# Altium PCB diban_v1.0.PcbDoc
Units mil, origin at the board's own origin, x right, y up, seen from the top; angles counter-clockwise.
Board outline 2755.91 x 2755.91 mil, 2 copper layers (Top Layer, Bottom Layer), stack 21.6 mil thick; 98 components, 78 nets, 436 pads, 149 vias.
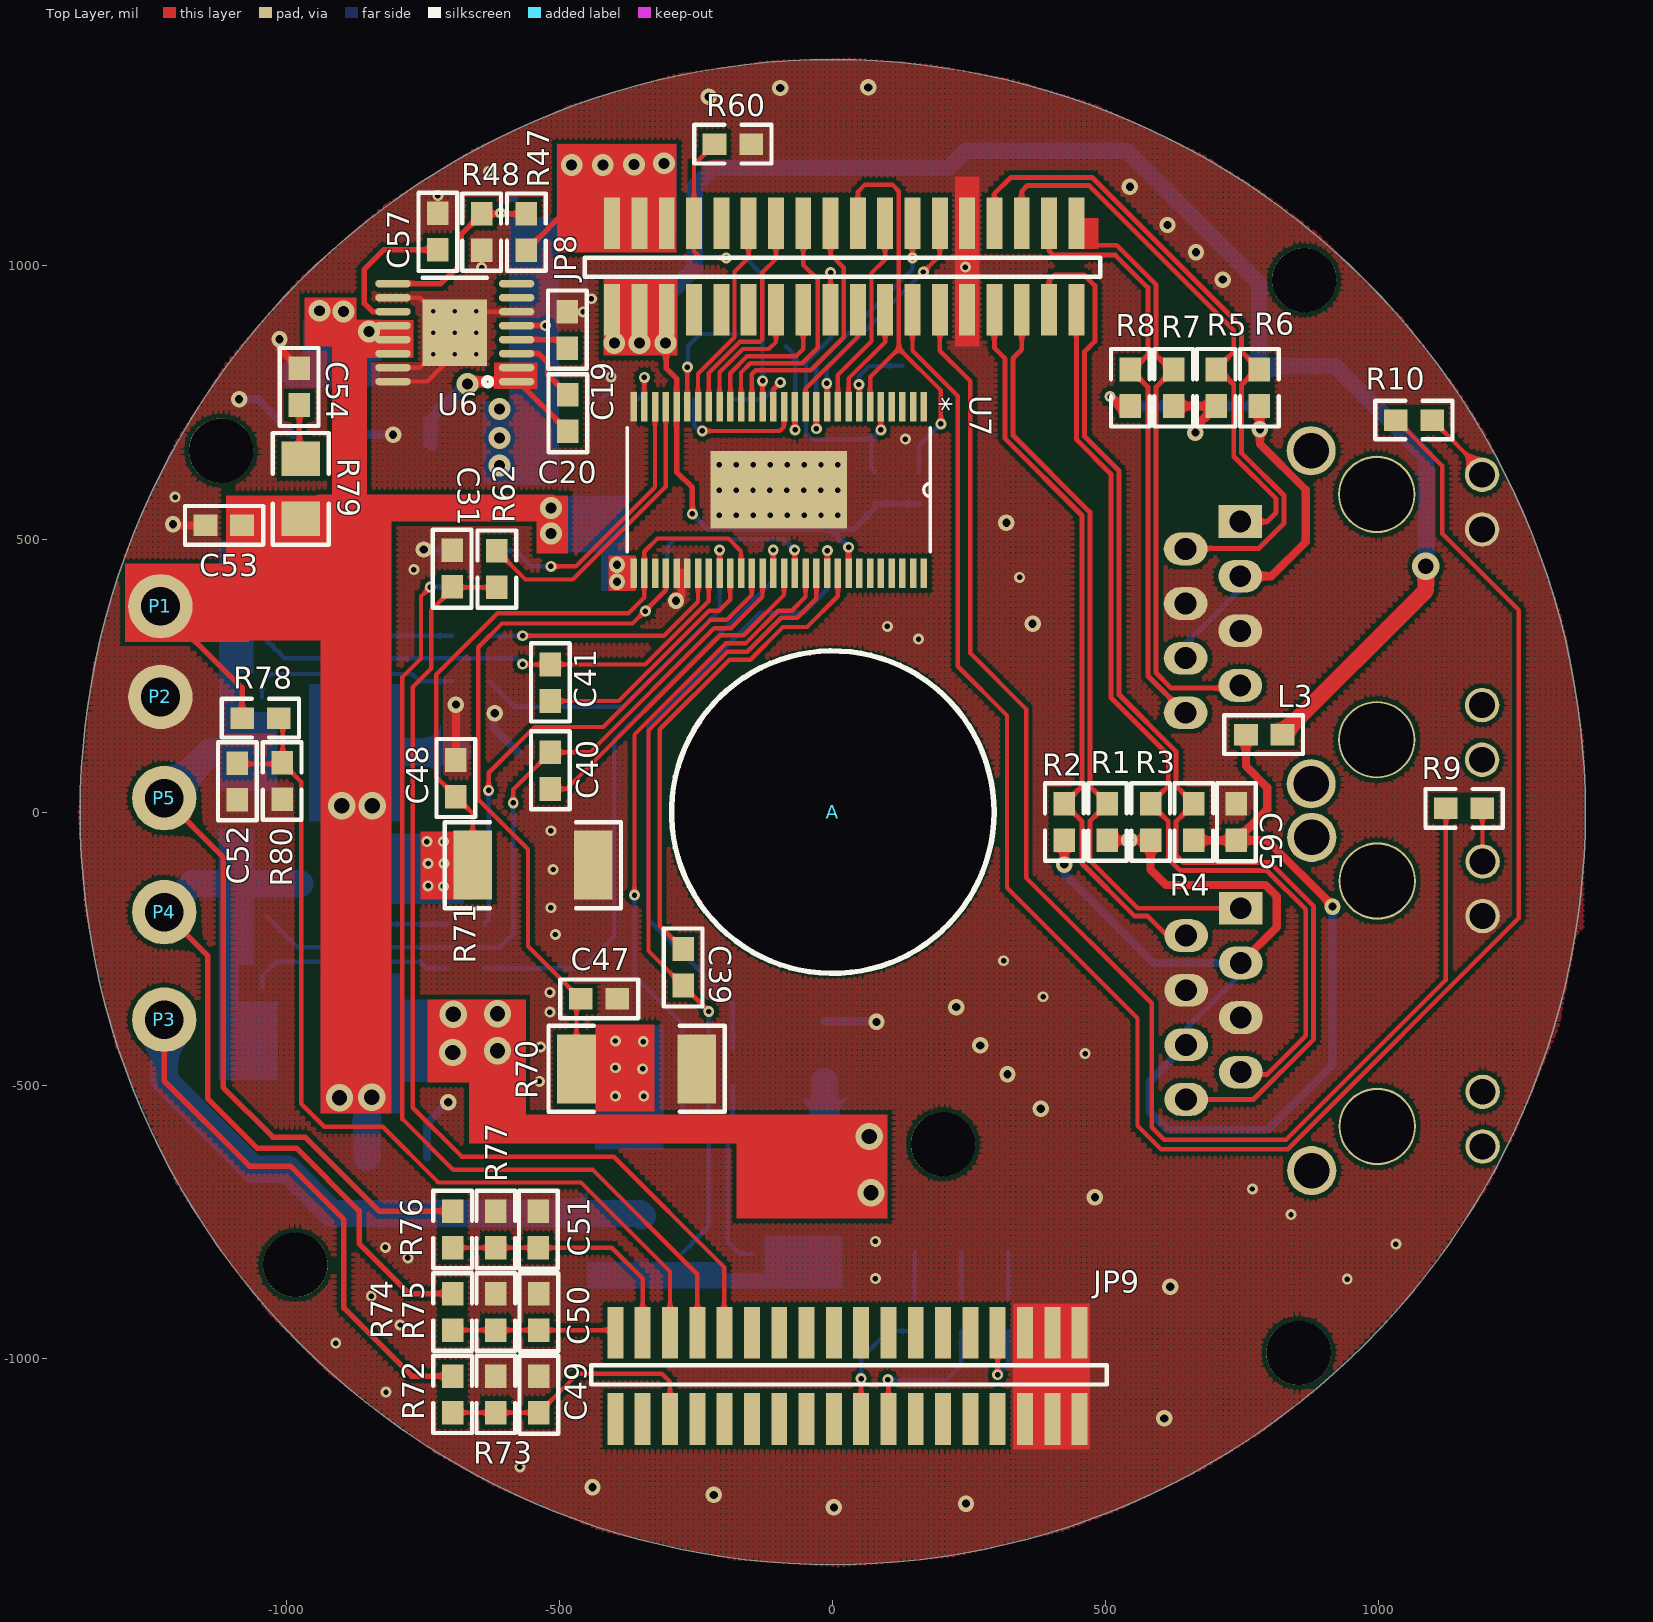
[diagram p0: Top Layer view]
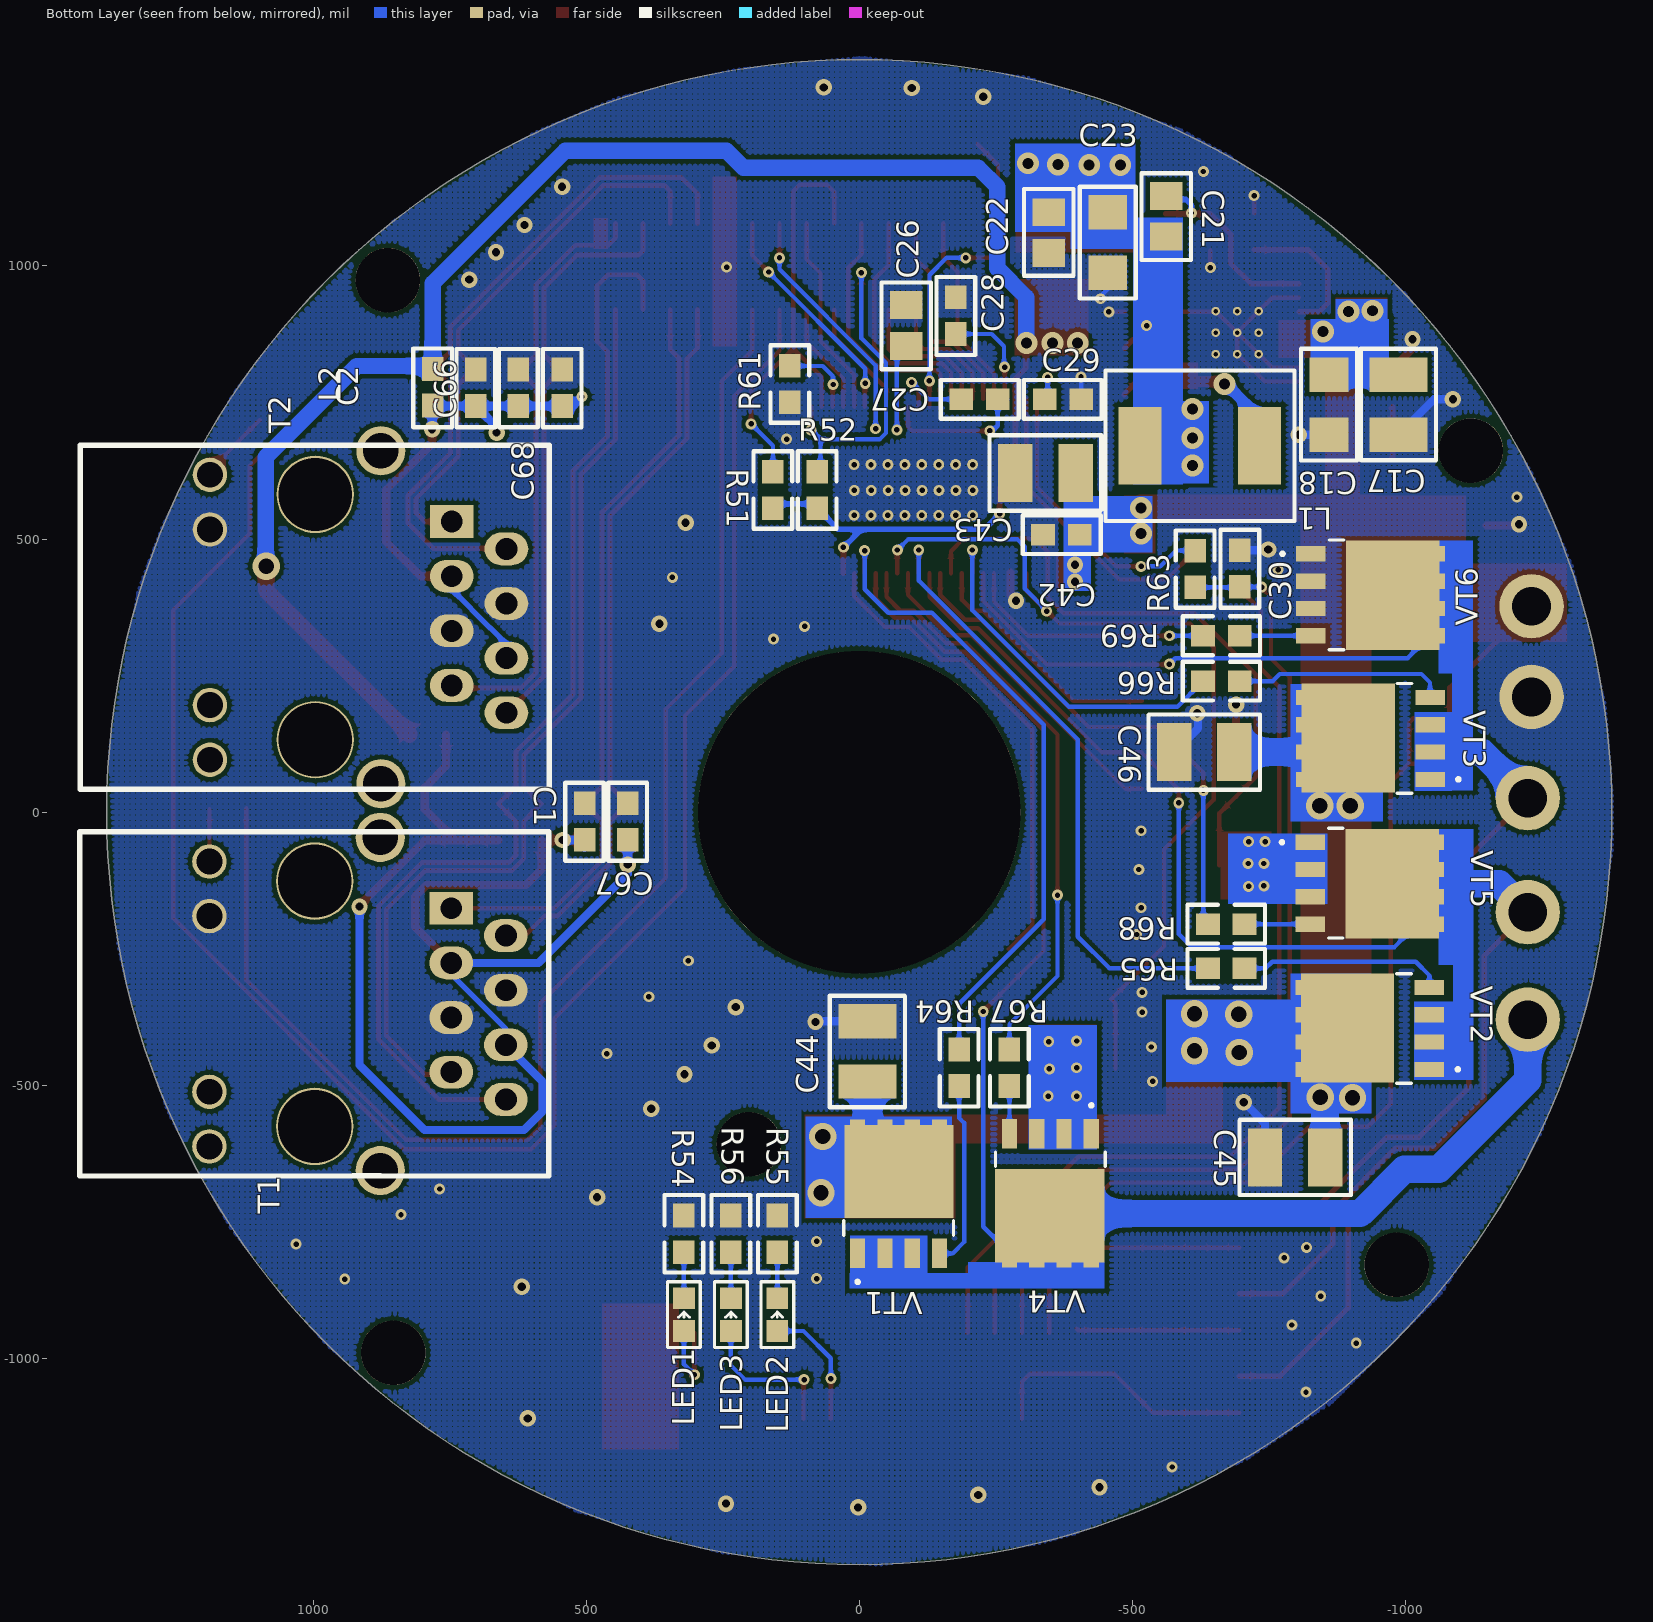
[diagram p1: Bottom Layer view, seen from below]

## Layer stack, top to bottom
Top Solder: solder mask 0.4, Solder Resist, Dk 3.5
Top Layer: signal copper 2.35
Dielectric 1: core 16.9, 3313, Dk 4.8
Bottom Layer: signal copper 2.35
Bottom Solder: solder mask 0.4, Solder Resist, Dk 3.5

## Board outline
-1377.95,0 ccw(c0,0) 0,-1377.95 ccw(c0,0) 1377.95,0 ccw(c0,0) 0,1377.95 ccw(c0,0)

## Design rules (kind name [scope] priority, off if disabled: settings)
Clearance Clearance_2 [InNet('GND')] p1: gap=8
Clearance Clearance_1 [InNet('48V') vs InNet('GND')] p2: gap=15
Clearance [All] p3: gap=5
ComponentClearance [All] p1: gap=0 collisioncheckmode=3 verticalgap=0 showdistances=FALSE
DiffPairsRouting [All] p1: maxlimit=5.5 minlimit=5.5 mostfreqgap=5.5 toplayer_minwidth=9 toplayer_maxwidth=9 toplayer_prefwidth=9 bottomlayer_minwidth=9 bottomlayer_maxwidth=9 bottomlayer_prefwidth=9 maxuncoupledlength=500
HoleSize [All] p1: absolutevalues=TRUE maxlimit=600 minlimit=1 maxpercent=80.000 minpercent=20.000
HoleToHoleClearance [All] p1: gap=5 allowstackedmicrovias=TRUE
MinimumSolderMaskSliver [All] p1: minsoldermaskwidth=0
PlaneClearance [All] p1: clearance=10
PlaneConnect [All] p1: planeconnectstyle=Relief reliefexpansion=12 reliefentries=4 reliefconductorwidth=15 reliefairgap=10
PolygonConnect [All] p1: connectstyle=Direct reliefconductorwidth=10 reliefentries=4 polygonreliefangle="90 Angle" airgapwidth=10
RoutingVias [All] p1: holewidth=10 width=20 viastyle="Through Hole" minholewidth=10 minwidth=20 maxholewidth=28 maxwidth=50
SilkToSilkClearance [All] p1: silktosilkclearance=0
SilkToSolderMaskClearance [IsPad] p1: minsilkscreentomaskgap=0 clearancetoexposedcopper=TRUE
SolderMaskExpansion [All] p1: expansion=10
UnpouredPolygon [All] p1: allowunpoured=FALSE
Width [All] p1: maxlimit=50 minlimit=5 preferedwidth=10
20 further rules are at their usual default settings.

## Classes and differential pairs
differential pair TXB: +TXB_P -TXB_N
differential pair TXA: +TXA_P -TXA_N
differential pair RXB: +RXB_P -RXB_N
differential pair RXA: +RXA_P -RXA_N

## Components (designator, comment, footprint, x,y, rotation, side; value= is the part's Value field where it differs from the comment)
A "circle" Circle 0,0 r90 top locked
C1 "0603B223J6R3NT" CC1608-0603 503,-17 r270 bottom
C2 "0603B223J6R3NT" CC1608-0603 702,777 r270 bottom
C17 "C3225X7S2A475M200AB" CC3225-1210 -987,746 r270 bottom
C18 "C3216X5R2A105K" CC3216-1206 -860,746 r270 bottom
C19 "0603B225J6R3NT" CC1608-0603 -486,883 r90 top
C20 "0603B474J6R3NT" CC1608-0603 -485,731 r270 top
C21 "CL21C360JBANNNC" CC2012-0805 -562,1091 r270 bottom
C22 "GRM21BR61E475KA12L" CC2012-0805 -347,1061 r90 bottom
C23 "GRM31CR61A476KE15L" CC3216-1206 -455,1043 r90 bottom
C26 "0603B225J6R3NT" CC2012-0805 -86,891 r270 bottom
C27 "0603B223J500NT" CC1608-0603 -220,756 r180 bottom
C28 "0603B105J250NT" CC1608-0603 -177,909 r270 bottom
C29 "0603B105J250NT" CC1608-0603 -373,756 r0 bottom
C30 "0603B222J6R3NT" CC1608-0603 -697,446 r270 bottom
C31 "0603B222J6R3NT" CC1608-0603 -697,446 r270 top
C39 "0603B104J500NT" CC1608-0603 -274,-284 r270 top
C40 "0603B104J500NT" CC1608-0603 -517,76 r90 top
C41 "0603B104J500NT" CC1608-0603 -517,237 r90 top
C42 "0603B104J101NT" CC1608-0603 -370,508 r180 bottom
C43 "GRM32ER72A225KA35L" CC3225-1210 -341,621 r180 bottom
C44 "GRM32ER72A225KA35L" CC3225-1210 -15,-438 r90 bottom
C45 "GRM32ER72A225KA35L" CC3225-1210 -798,-632 r0 bottom
C46 "GRM32ER72A225KA35L" CC3225-1210 -631.54,110 r0 bottom
C47 "0603B102J500NT" CC1608-0603 -428,-342 r0 top
C48 "0603B102J500NT" CC1608-0603 -690,62 r90 top
C49 "0603B104J160NT" CC1608-0603 -538,-1066 r270 top
C50 "0603B104J160NT" CC1608-0603 -538,-915 r270 top
C51 "0603B104J160NT" CC1608-0603 -539,-764 r270 top
C52 "0603B104J160NT" CC1608-0603 -1090,56 r90 top
C53 "0603B104J101NT" CC1608-0603 -1115,525 r0 top
C54 "0603B103J101NT" CC1608-0603 -977,779 r270 top
C57 "0603B474J6R3NT" CC1608-0603 -723,1063 r270 top
C65 "0402B104J6R3NT" CC1608-0603 739,-18 r270 top
C66 "0402B104J6R3NT" CC1608-0603 544,777 r270 bottom
C67 "0603B223J6R3NT" CC1608-0603 424,-17 r270 bottom
C68 "0603B223J6R3NT" CC1608-0603 624,777 r270 bottom
JP8 "Header 18X2" DC_1.27_36 -404,920 r180 top locked
JP9 "Header 18X2" DC_1.27_36 452,-953 r0 top locked
L1 "SPR6540-150M" SPR6540 -733,671 r0 bottom
L2 "BLM18EG221SN1D" BLM0603 781,778 r270 bottom
L3 "BLM18EG221SN1D" BLM0603 790,142 r180 top
LED1 "LED Chip" 0603D 321,-950 r90 bottom
LED2 "LED Chip" 0603D 150,-950 r90 bottom
LED3 "LED Chip" 0603D 235,-950 r90 bottom
P1 "PAD" PAD#1 -1231,377 r0 top
P2 "PAD" PAD#1 -1231,211 r0 top
P3 "PAD" PAD#1 -1224,-380 r90 top
P4 "PAD" PAD#2 -1224,-203 r90 top
P5 "PAD" PAD#3 -1224,-20 r90 top
R1 "RC03K49R9JT" CR1608-0603 503,-18 r270 top
R2 "RC03K49R9JT" CR1608-0603 424,-18 r270 top
R3 "RC03K49R9JT" CR1608-0603 582,-18 r270 top
R4 "RC03K49R9JT" CR1608-0603 661,-18 r270 top
R5 "RC03K49R9JT" CR1608-0603 702,777 r270 top
R6 "RC03K49R9JT" CR1608-0603 781,777 r270 top
R7 "RC03K49R9JT" CR1608-0603 624,777 r270 top
R8 "RC03K49R9JT" CR1608-0603 545,777 r270 top
R9 "RC03K331JT" CR1608-0603 1156,7 r0 top
R10 "RC03K331JT" CR1608-0603 1064,718 r0 top
R47 "RC03K105JT" CR1608-0603 -561,1062 r90 top
R48 "RC03K2553JT" CR1608-0603 -643,1062 r270 top
R51 "RC03K103JT" CR1608-0603 158,590 r270 bottom
R52 "RC03K103JT" CR1608-0603 77,590 r270 bottom
R54 "RC03K331JT" CR1608-0603 321,-772 r270 bottom
R55 "RC03K331JT" CR1608-0603 150,-772 r270 bottom
R56 "RC03K331JT" CR1608-0603 235,-772 r270 bottom
R60 "RC03K102JT" CR1608-0603 -183,1223 r180 top
R61 "RC03K101JT" CR1608-0603 127,784 r90 bottom
R62 "RC03K560JT" CR1608-0603 -615,445 r90 top
R63 "RC03K560JT" CR1608-0603 -615,445 r90 bottom
R64 "RC03K100JT" CR1608-0603 -183,-468 r90 bottom
R65 "RC03K100JT" CR1608-0603 -672,-286 r0 bottom
R66 "RC03K100JT" CR1608-0603 -663,240 r0 bottom
R67 "RC03K100JT" CR1608-0603 -275,-468 r90 bottom
R68 "RC03K100JT" CR1608-0603 -672,-205 r0 bottom
R69 "RC03K100JT" CR1608-0603 -663,323 r0 bottom
R70 "CRA2512-FZ-R010ELF" CR6332-2512 -359,-470 r180 top
R71 "CRA2512-FZ-R010ELF" CR6332-2512 -549,-97 r180 top
R72 "RC03K8452JT" CR1608-0603 -696,-1066 r270 top
R73 "RC03K4991JT" CR1608-0603 -617,-1066 r270 top
R74 "RC03K8452JT" CR1608-0603 -696,-915 r270 top
R75 "RC03K4991JT" CR1608-0603 -617,-915 r270 top
R76 "RC03K8452JT" CR1608-0603 -696,-764 r270 top
R77 "RC03K4991JT" CR1608-0603 -617,-764 r270 top
R78 "RC03K8452JT" CR1608-0603 -1048,172 r180 top
R79 "CRCW12063R30JNEA" CR3216-1206 -974,592 r270 top
R80 "RC03K4991JT" CR1608-0603 -1008,57 r90 top
T1 "HR911102_RJ45" RJ45 647,-326 r90 bottom
T2 "HR911102_RJ45" RJ45 646,382 r90 bottom
U6 "LM46002PWPR" IM46002 -692,878 r180 top
U7 "DRV8301" DRV8301 -99,590 r270 top
VT1 "CSD18540" "CSD18540 - duplicate" -72,-699 r90 bottom
VT2 "CSD18540" "CSD18540 - duplicate" -935,-396 r0 bottom
VT3 "CSD18540" "CSD18540 - duplicate" -936,135 r0 bottom
VT4 "CSD18540" "CSD18540 - duplicate" -350,-698 r270 bottom
VT5 "CSD18540" "CSD18540 - duplicate" -935,-130 r180 bottom
VT6 "CSD18540" "CSD18540 - duplicate" -936,398 r180 bottom

## Footprints (in the part's own frame and the unit in brackets; to place one, negate y for a bottom-side part, rotate by r counter-clockwise, add the part's x,y. Pads: shape width x height; smd on the part's side, far side on the other; paste and mask are expansions set on the pad)
0603D [mil]
  rect 40x40 smd: 1(0,0) 2(60,0)
  silkscreen extent -30,-30 90,30
BLM0603 [mm]
  rect 1.1x1 smd: 1(-0.85,0) 2(0.85,0)
  silkscreen extent -1.8,-0.9 1.86,0.9
CC1608-0603 [mm]
  rect 1.1x1 smd: 1(-0.85,0) 2(0.85,0)
  silkscreen extent -1.8,-0.9 1.83,0.9
CC2012-0805 [mm]
  rect 1.3x1.5 smd: 1(-0.95,0) 2(0.95,0)
  silkscreen extent -2,-1.15 2.03,1.15
CC3216-1206 [mm]
  rect 1.6x1.8 smd: 1(-1.4,0) 2(1.4,0)
  silkscreen extent -2.6,-1.3 2.59,1.3
CC3225-1210 [mm]
  rect 1.6x2.7 smd: 1(-1.4,0) 2(1.4,0)
  silkscreen extent -2.6,-1.75 2.59,1.75
Circle [mm]
  round 15 hole 15: 0(0,0)
  silkscreen extent -7.5,-7.5 7.5,7.5
CR1608-0603 [mm]
  rect 1.1x1 smd: 1(-0.85,0) 2(0.85,0)
  silkscreen extent -1.8,-0.9 1.8,0.9
CR3216-1206 [mm]
  rect 1.6x1.8 smd: 1(-1.4,0) 2(1.4,0)
  silkscreen extent -2.6,-1.3 2.6,1.3
CR6332-2512 [mm]
  rect 1.8x3.2 smd: 1(-2.8,0) 2(2.8,0)
  silkscreen extent -4.1,-2 4.1,2
"CSD18540 - duplicate" [mm]
  rect 1.372x0.71 smd paste-0.673: 1(-2.77,-0.635) 1(-2.77,0.635) 1(-2.77,1.905) 4(-2.77,-1.905) 5(2.77,-1.905) 5(2.77,-0.635) 5(2.77,0.635) 5(2.77,1.905)
  rect 4.343x5.08 smd: 5(1.041,-0.025)
  silkscreen extent -4.17,-2.55 -1.25,2.55
DC_1.27_36 [mm]
  rect 0.74x2.4 smd: 1(0,0) 2(0,-4.013) 3(-1.27,0) 4(-1.27,-4.013) 5(-2.54,0) 6(-2.54,-4.013) 7(-3.81,0) 8(-3.81,-4.013) 9(-5.08,0) 10(-5.08,-4.013) 11(-6.35,0) 12(-6.35,-4.013) 13(-7.62,0) 14(-7.62,-4.013) 15(-8.89,0) 16(-8.89,-4.013) 17(-10.16,0) 18(-10.16,-4.013) 19(-11.43,0) 20(-11.43,-4.013) 21(-12.7,0) 22(-12.7,-4.013) 23(-13.97,0) 24(-13.97,-4.013) 25(-15.24,0) 26(-15.24,-4.013) 27(-16.51,0) 28(-16.51,-4.013) 29(-17.78,0) 30(-17.78,-4.013) 31(-19.05,0) 32(-19.05,-4.013) 33(-20.32,0) 34(-20.32,-4.013) 35(-21.59,0) 36(-21.59,-4.013)
  silkscreen extent -22.71,-2.41 1.27,-1.52
DRV8301 [mil]
  rect 54x12 smd: 1(-152.5,265.75) 2(-152.5,246.06) 3(-152.5,226.38) 4(-152.5,206.69) 5(-152.5,187.01) 6(-152.5,167.32) 7(-152.5,147.64) 8(-152.5,127.95) 9(-152.5,108.27) 10(-152.5,88.58) 11(-152.5,68.9) 12(-152.5,49.21) 13(-152.5,29.53) 14(-152.5,9.84) 15(-152.5,-9.84) 16(-152.5,-29.53) 17(-152.5,-49.21) 18(-152.5,-68.9) 19(-152.5,-88.58) 20(-152.5,-108.27) 21(-152.5,-127.95) 22(-152.5,-147.64) 23(-152.5,-167.32) 24(-152.5,-187.01) 25(-152.5,-206.69) 26(-152.5,-226.38) 27(-152.5,-246.06) 28(-152.5,-265.75) 29(152.5,-265.75) 30(152.5,-246.06) 31(152.5,-226.38) 32(152.5,-206.69) 33(152.5,-187.01) 34(152.5,-167.32) 35(152.5,-147.64) 36(152.5,-127.95) 37(152.5,-108.27) 38(152.5,-88.58) 39(152.5,-68.9) 40(152.5,-49.21) 41(152.5,-29.53) 42(152.5,-9.84) 43(152.5,9.84) 44(152.5,29.53) 45(152.5,49.21) 46(152.5,68.9) 47(152.5,88.58) 48(152.5,108.27) 49(152.5,127.95) 50(152.5,147.64) 51(152.5,167.32) 52(152.5,187.01) 53(152.5,206.69) 54(152.5,226.38) 55(152.5,246.06) 56(152.5,265.75)
  round 20 / inner round 60 / far side round 20 hole 10: 57(-46.5,108.5) 57(-46.5,77.5) 57(-46.5,46.5) 57(-46.5,-15.5) 57(-46.5,15.5) 57(-46.5,-46.5) 57(-46.5,-77.5) 57(-46.5,-108.5) 57(1,108) 57(1,77) 57(1,46) 57(1,15) 57(1,-16) 57(1,-47) 57(1,-78) 57(1,-109) 57(46.5,108.5) 57(46.5,77.5) 57(46.5,46.5) 57(46.5,-15.5) 57(46.5,15.5) 57(46.5,-46.5) 57(46.5,-77.5) 57(46.5,-108.5)
  rect 142.13x250 smd mask-124.5: 57(0,0)
  silkscreen extent -114,-278 114,278
IM46002 [mm]
  oval 1.65x0.35 smd paste-0.102 mask+0.051: 1(-2.875,2.275) 2(-2.875,1.625) 3(-2.875,0.975) 4(-2.875,0.325) 5(-2.875,-0.325) 6(-2.875,-0.975) 7(-2.875,-1.625) 8(-2.875,-2.275) 9(2.875,-2.275) 10(2.875,-1.625) 11(2.875,-0.975) 12(2.875,-0.325) 13(2.875,0.325) 14(2.875,0.975) 15(2.875,1.625) 16(2.875,2.275)
  round 0.4 / inner round 1.524 / far side round 0.4 hole 0.2 mask+0.051: 17(-1,1) 17(-1,0) 17(-1,-1) 17(0,1) 17(0,0) 17(0,-1) 17(1,1) 17(1,0) 17(1,-1)
  rect 3x3.1 smd paste-0.102 mask+0.051: 17(0,0)
  silkscreen extent -1.7,-2.55 1.5,2.47
PAD#1 [mm]
  round 3 hole 1.8: 1(0,0)
PAD#2 [mm]
  round 3 hole 1.8: 1(0.504,0)
PAD#3 [mm]
  round 3 hole 1.8: 1(1.16,0)
RJ45 [mm]
  round 3.6 hole 3.4: 0(-6.335,8.89) 0(5.075,8.89)
  rect 1.524x2.032 hole 1.016: 1(3.81,2.54)
  oval 1.524x2.032 hole 1.016: 2(2.54,0) 3(1.27,2.54) 4(0,0) 5(-1.27,2.54) 6(-2.54,0) 7(-3.81,2.54) 8(-5.08,0)
  round 1.6 hole 1.2: 9(5.985,13.79) 10(3.445,13.79) 11(-4.725,13.79) 12(-7.265,13.79)
  round 2.286 hole 1.651: 13(-8.385,5.84) 14(7.105,5.84)
  silkscreen extent -8.64,-2 7.36,19.81
SPR6540 [mm]
  rect 2x3.6 smd: 1(0,0) 2(5.55,0)
  silkscreen extent -1.63,-3.5 7.16,3.5

## Part data
C1 C2 C17 C18 C19 C20 C21 C22 C23 C26 C27 C28 C29 C30 C31 C39 C40 C41 C42 C43 C44 C45 C46 C47 C48 C49 C50 C51 C52 C53 C54 C57 C65 C66 C67 C68: library part CAP
JP8 JP9: "Header,36-Pin, Dual row"
L1: library part "Inductor Chip", "Inductor"
L2 L3: library part "Inductor Iron", "Magnetic-Core Inductor"
LED1 LED2 LED3: "Typical Chip LED"
R1 R2 R3 R4 R5 R6 R7 R8 R9 R10 R47 R48 R51 R52 R54 R55 R56 R60 R61 R62 R63 R64 R65 R66 R67 R68 R69 R70 R71 R72 R73 R74 R75 R76 R77 R78 R79 R80: library part Resistor
U6: "Imported"

## Free pads (board coordinates)
  round 118.11 hole 118.11: 8(863,974) 9(-1120,662) 9(-984.02,-829.02) 9(202,-608) 9(853,-990)

## Via types
v1: diameter 20, hole 10, Top Layer to Bottom Layer, 85 vias
v2: diameter 30, hole 15, Top Layer to Bottom Layer, 37 vias
v3: diameter 40, hole 20, Top Layer to Bottom Layer, 16 vias
v4: diameter 50, hole 28, Top Layer to Bottom Layer, 11 vias

## Nets (pads, with @x,y where several pads share a name; then routed paths per layer and width w, separated by ;. In a path a pad name is that pad's centre, name@x,y a point inside that pad or via, vN(x,y) a via of type N, cw(c..) or ccw(c..) an arc to the next point about the centre after c; other vN are vias at no path point)
3V3: JP8.1 JP8.3 JP8.5 L2.1 L3.1 R51.2 R52.2 U7.24 U7.49 | length 3491.3
  Top Layer w8: v3(-306,859) v3@-305,858 ; v1@28.95,483.95 29,484 v1(29,485)
  Top Layer w10: v3@-305,858 -305,812.99 -286.01,793.99 U7.24 -286.01,623.01 -257,594 v1(-257,546) ; U7.49 v1@28.95,483.95
  Top Layer w30: L3.1 823.46,143.46 1086,406 v4(1086,450)
  Bottom Layer w10: v1(-257,546) -229,518 -4,518 ; v1(29,485) -4,518 ; R52.2 38.46,518 -4,518 ; R52.2@77,564.41 R51.2@158,564.41
  Bottom Layer w30: v3(-306,859) -306,943 -253,996 -253,1145 -218,1180 212,1180 243,1211 538.5,1211 781,968.5 L2.1 786.54,817 920,817 1086.87,650.13 1086.87,450.87 v4(1086,450)
  other v3: -400,859 -354,859
5V0: C21.2 C22.2 C23.2 JP8.2 JP8.4 JP8.6 L1.2 R47.1 U6.5 | length 243.7
  Top Layer w10: U6.5 -526.2,890.8 v1(-526,891) ; R47.1 -478,1111.54 v3(-478,1185)
  other v3: -610,635 -610,685 -610,738 -421,1185 -364,1186 -309,1188
48V: C17.1 C18.1 C42.2 C43.2 C44.1 C45.1 C46.1 C53.2 P1.1 R78.2 R79.2 U6.12 U6.13 U6.14 U7.29 VT1.5 VT2.5 VT3.5 | length 1264.9
  Top Layer w10: P1.1 -1081.46,227.46 R78.2
  Top Layer w50: -938,557 v3(-516,557)
  Bottom Layer w50: C17.1@-987,803.12 C18.1@-854,803.12 ; C45.1 -853.12,-539.12 -844,-530 v4(-844,-522) ; VT3.5@-826.94,110 C46.1 ; VT1.5@-73,-658 -15,-600 C44.1
  other v2: -395,422 -395,453
  other v3: -516,510 -849,880 -896,917 -940,918
  other v4: 70,-697 67,-594 -903,-523 -696,-440 -614,-437 -695,-370 -614,-369 -899,12 -843,12
CHIP_MODE0: JP8.25 R9.1 | length 2641.4
  Top Layer w8: JP8.25 196,845 252,789 252,291 354,189 354,-120 584,-350 584,-577 607,-600 830,-600 1122.54,-307.46 R9.1
CHIP_MODE1: JP8.23 R10.1 | length 3561.9
  Top Layer w5: R10.1 R10.1@1032,718
  Top Layer w8: JP8.23 146,845 229,762 229,267 319,177 319,-138.38 558,-377.38 558,-574 601,-617 833,-617 1256,-194 1256,370 1116,510 1116,634 R10.1@1032,718
DC_CAL: JP8.19 U7.12 | length 203.2
  Top Layer w8: U7.12@-49.79,756.5 -49.79,775.21 46,871 JP8.19
DC_V_FB: C52.2 JP9.31 R78.1 R80.2 | length 1721.8
  Top Layer w8: C52.2@-1088,88.46 -1008,88.46 -1007,87.46 R80.2@-1007,89.46 ; R78.1 -1007,164.46 R80.2@-1007,89.46 ; R80.2 R80.2@-1007,89.46 ; -723,-678 -461,-678 -298,-841 JP9.31 ; -723,-677 -824,-576 -931,-576 -973,-534 -973,55.46 R80.2@-1007,89.46
EN_GATE: JP8.8 R60.2 U7.16 | length 595.4
  Top Layer w8: R60.2 -254,1185.46 JP8.8 -254,1027 -242,1015 v1(-195,1015) ; U7.16 v1(-128.53,789.53)
  Bottom Layer w8: v1(-195,1015) -160,1015 -129,984 ; v1(-128.53,789.53) -128.53,983.53
GH_A: R64.2 U7.47 | length 1202.1
  Top Layer w8: U7.47 -10.42,478.58 v1(-10,479)
  Bottom Layer w8: R64.2 -183,-351 -338,-196 -338,160 -133,365 -53,365 -10,408 v1(-10,479)
GH_B: R65.2 U7.42 | length 1133.7
  Top Layer w8: v1(-109,480) -109,474 -108.84,473.84 U7.42
  Bottom Layer w8: R65.2 -458,-286 -400,-228 -400,133 -109,424 v1(-109,480)
GH_C: R66.2 U7.37 | length 667.9
  Top Layer w8: U7.37 -207.27,479.73 v1(-207,480)
  Bottom Layer w8: R66.2 -582.54,193 -384,193 -207,370 v1(-207,480)
GL_A: R67.2 U7.45 | length 1074
  Top Layer w8: v1(-363,-152) -363,142 -196,309 -159.62,309 -99.81,368.81 -75.19,368.81 -49.79,394.21 U7.45
  Bottom Layer w8: v1(-363,-152) -363,-300 -275,-388 R67.2
GL_B: R68.2 U7.40 | length 937
  Top Layer w8: v1(-630,40) -630,72 -546,156 -420,156 -224,352 -194,352 -148.21,397.79 U7.40
  Bottom Layer w8: R68.2 -630,-196.46 v1(-630,40)
GL_C: R69.2 U7.35 | length 460.9
  Top Layer w8: v1(-568,323) -309,323 -246.64,385.36 U7.35
  Bottom Layer w8: R69.2 v1(-568,323)
GND: C1.1 C2.1 C17.2 C18.2 C19.2 C22.1 C23.1 C26.1 C28.1 C29.1 C30.1 C31.1 C42.1 C43.1 C44.2 C45.2 C46.2 C47.2 C48.2 C49.1 C50.1 C51.1 C52.1 C53.1 C54.1 C57.1 C65.1 C66.1 C67.1 C68.1 JP8.27 JP8.28 JP9.1 JP9.2 JP9.3 JP9.4 JP9.5 JP9.6 P2.1 R48.2 R54.1 R55.1 R56.1 R60.1 R61.1 R70.1 R71.1 R73.1 R75.1 R77.1 R80.1 T1.4 T1.5 T1.10 T2.4 T2.5 T2.10 U6.6 U6.10 U6.15 U6.16 U6.17 U7.28 U7.31 U7.33 U7.34 U7.57 VT6.1 | length 1612.4
  Top Layer w8: U6.16 -742.57,788.43 -692,839 U6.17@-692,878 ; U6.15 -755.98,814.02 -731.37,838.63 U6.17@-692,878 ; U6.10 -755.98,941.98 -731.37,917.37 U6.17@-692,878 ; C57.1 v1(-723,1129) ; v1(-643,997) R48.2 ; U6.6 -653.61,916.39 U6.17@-692,878 ; C19.2 -457.46,916.46 v1(-457,916)
  Top Layer w15: v2(-1208,527) -1206,525 C53.1 ; v2(-1013,866) -1013,848.46 C54.1 ; C48.2 v2(-690,197) ; v2(-287,387) -277,397 -277,439
  Bottom Layer w8: C23.1 -455,958 -442,945 v1(-442,940) ; C29.1@-423.46,756 -406.46,773 -406.46,796.54 v1(-406,797)
  Bottom Layer w15: v2(-1087,756) -1052.12,756 C17.2 ; C18.2 -805.12,690.88 v2(-805,691) ; v2(-749,481) -751,481 -749.46,479.46 C30.1 ; C45.2 -742.88,-569.88 v2(-704,-531) ; v2(-619,181) -620,182 -620,153.58 C46.2 ; C44.2 80.88,-382.88 83,-385 81,-385 v2(80,-384)
  other v1: -573,-1199 -818,-1062 -910,-972 -792,-939 -845,-886 942,-855 78,-854 -778,-816 -819,-797 1031,-791 78,-786 839,-737 768.44,-690 -537,-493 462,-442 -535,-430 -518,-366 385,-338 -518,-330 313,-272 -508,-224 -516,-175 -512,-105 -516,-34 157,317 100,340 342,430 -767,444 -1204,577 133,683 243,998 -630,1173
  other v2: 2,-1273 244,-1266 -218,-1250 -440,-1236 607,-1110 618,-869 480,-705 381,-543 320,-480 270,-427 226,-357 366,345 318,530 714,975 665,1025 613,1075 544,1145 -227,1310 -96,1326 65,1327
IA: C31.2 JP9.27 R62.1 | length 1877.1
  Top Layer w8: R62.1 -696,411.54 C31.2 -697,408 -735,370 -735,263 -769,229 -769,-541 -679,-631 -401,-631 -199,-833 -199,-952 JP9.27
IB: C30.2 JP9.29 R63.1 | length 1882.4
  Top Layer w8: v1(-737,412) -754,395 -754,281.38 -788,247.38 -788,-562 -695,-655 -439,-655 -248,-846 JP9.29
  Bottom Layer w8: v1(-737,412) -736.46,412.54 C30.2 -696,411.54 R63.1
INH_A: JP8.18 U7.17 | length 474
  Top Layer w8: U7.17 -148.21,801.79 -141,809 -40.46,809 20,869.46 20,997 -4,1021 JP8.18
INH_B: JP8.15 U7.19 | length 271.2
  Top Layer w8: U7.19@-187.58,756.5 -187.58,803.8 -156.38,835 -67,835 -54,848 JP8.15
INH_C: JP8.14 U7.21 | length 393.6
  Top Layer w8: U7.21@-226.95,756.5 -226.95,804.12 -170.08,861 -134,861 -129,866 -129,988 -104,1013 JP8.14
INL_A: JP8.16 U7.18 | length 446.2
  Top Layer w8: U7.18@-167.9,756.5 -167.9,805.1 -151,822 -56,822 -27.57,850.43 -27.57,975.57 -54,1002 JP8.16
INL_B: JP8.13 U7.20 | length 234.2
  Top Layer w8: U7.20@-207.27,756.5 -207.27,805.42 -164.69,848 -117,848 -104,861 JP8.13
INL_C: JP8.12 U7.22 | length 359.9
  Top Layer w8: U7.22@-246.64,756.5 -246.64,802.82 -180,869.46 -180,989.38 -154,1015.38 JP8.12
LED1: JP9.7 LED1.1 | length 164.9
  Top Layer w8: v1(302,-1030) JP9.7
  Bottom Layer w8: v1(302,-1030) 321,-1011 LED1.1
LED2: JP9.18 LED2.1 | length 229.7
  Top Layer w8: JP9.18 v1(52,-1037)
  Bottom Layer w8: v1(52,-1037) 52,-1000 102,-950 LED2.1
LED3: JP9.16 LED3.1 | length 280.2
  Top Layer w8: v1(101,-1039) 102,-1040 JP9.16
  Bottom Layer w8: v1(101,-1039) 209,-1039 235,-1013 LED3.1
NetC19_1: C19.1 U6.4 | length 99.3
  Top Layer w10: U6.4 -501.66,865.2 C19.1
NetC20_1: C20.1 U6.3 | length 137.6
  Top Layer w10: U6.3 -538.61,839.61 -522,823 -522,801.46 C20.1
NetC20_2: C20.2 L1.1 U6.1 U6.2 | length 419.6
  Top Layer w10: U6.1 -575.89,788.43 C20.2
  Top Layer w20: v3(-669,784) -670,785 -670,789 -669.43,788.43 U6.1
  Bottom Layer w10: L1.1@-744,671 L1.1@-744,721
  Bottom Layer w20: L1.1 -733,723 -672,784 v3(-669,784)
NetC21_1: C21.1 R47.2 R48.1 U6.9 | length 375
  Top Layer w10: U6.9 -717.43,967.57 -680,1005 -680,1058.46 R48.1 R47.2
  Bottom Layer w10: v1(-608,1097) -608,1112 -598,1122 C21.1@-580.6,1122
NetC26_2: C26.2 U7.13 | length 211.7
  Top Layer w8: v1@-69.47,705.47 U7.13@-69.47,756.5
  Bottom Layer w8: C26.2 -69,836.6 v1(-69,700)
NetC27_1: C27.1 U7.15 | length 154.6
  Top Layer w8: U7.15 -108.84,774.16 v1(-96,787)
  Bottom Layer w8: C27.1@-204,754.46 C27.1@-203,755.46 ; C27.1 -127,756 v1(-96,787)
NetC27_2: C27.2 U7.14 | length 257.4
  Top Layer w8: v1(-239,698) -97,698 -89.16,705.84 U7.14
  Bottom Layer w8: C27.2@-271,755.46 C27.2@-270.46,756 ; C27.2 -253.46,707.54 -243.93,698 v1(-239,698)
NetC28_2: C28.2 U7.23 | length 194.4
  Top Layer w8: U7.23@-266.32,756.5 -266.32,814.68 v1(-266,815)
  Bottom Layer w8: v1(-266,815) -265,816 -265,853 -242.46,875.54 C28.2
NetC29_2: C29.2 U7.27 | length 84.3
  Top Layer w8: U7.27@-345.06,756.5 v1@-345.06,796
  Bottom Layer w8: C29.2@-356.54,756 -345,767.54 v1(-345,796)
NetC39_1: C39.1 U7.48 | length 888.8
  Top Layer w8: C39.1 -316.62,-207.92 -316.62,151.62 -189.12,279.12 -151.2,279.12 -91.31,339 -47,339 9.27,395.27 U7.48
NetC40_1: C40.1 U7.43 | length 614.7
  Top Layer w8: C40.1 -487.46,42.54 -206,324 -163,324 -89.16,397.84 U7.43
NetC41_1: C41.1 U7.38 | length 454.5
  Top Layer w8: C41.1 -391.7,203.54 -226.23,369 -208,369 -188,389 -188,437.08 U7.38
NetC54_2: C54.2 R79.1 | length 99.5
  Top Layer w10: R79.1 -976.54,649.65 -976.54,742 C54.2@-974,739.46
NetC57_2: C57.2 U6.11 | length 271
  Top Layer w10: U6.11 -842.39,916.39 -858,932 -858,994 -822.46,1029.54 C57.2
NetLED1_2: LED1.2 R54.2 | length 84.5
  Bottom Layer w8: LED1.2 R54.2
NetLED2_2: LED2.2 R55.2 | length 84.5
  Bottom Layer w8: LED2.2 R55.2
NetLED3_2: LED3.2 R56.2 | length 84.5
  Bottom Layer w8: LED3.2 R56.2
NetR9_2: R9.2 T1.9 | length 94
  Top Layer w8: T1.9@1189.54,-88.99 R9.2@1189.54,5
NetR10_2: R10.2 T2.9 | length 138.2
  Top Layer w5: T2.9 T2.9@1188.91,626.55
  Top Layer w8: R10.2 T2.9@1188.91,626.55
NetR61_2: R61.2 U7.7 | length 142.8
  Top Layer w8: v1(48,783) 48.64,782.36 U7.7
  Bottom Layer w8: v1(48,783) 48,798 67,817 112.54,817 113,817.46 R61.2
NetR62_2: R62.2 U7.25 | length 561.8
  Top Layer w8: R62.2 -562.54,426 -476,426 -305.69,596.31 U7.25@-305.69,756.5
NetR63_2: R63.2 U7.26 | length 523.4
  Top Layer w8: v1(-516,450) -470.38,450 -325.38,595.01 U7.26 U7.26@-325.38,756.5
  Bottom Layer w8: R63.2 -614.46,479 -580,479 -551,450 v1(-516,450)
NetR64_1: R64.1 VT1.4 | length 343
  Bottom Layer w8: R64.1 -183,-560 -192,-569 -192,-787.11 -171.06,-808.06 VT1.4
NetR65_1: R65.1 VT2.4 | length 375.9
  Bottom Layer w8: VT2.4 -1044,-320.94 -1044,-299 -1019,-274 -756,-274 -744,-286 R65.1
NetR66_1: R66.1 VT3.4 | length 387.7
  Bottom Layer w8: VT3.4 -1045,210.06 -1045,237.25 -1029.25,253 -770,253 -757,240 R66.1
NetR67_1: R67.1 VT4.4 | length 87.5
  Bottom Layer w8: VT4.4 R67.1
NetR68_1: R68.1 VT5.4 | length 120.5
  Bottom Layer w8: VT5.4 R68.1
NetR69_1: R69.1 VT6.4 | length 130.5
  Bottom Layer w8: VT6.4 R69.1
NFAULT: JP8.20 R51.1 U7.6 | length 833.7
  Top Layer w8: JP8.20 46,1136 59,1149 109,1149 121,1137 121,849 ; U7.6 68.32,796.32 121,849 ; v1(198,711) 198,772 121,849
  Bottom Layer w8: R51.1 158,671 v1(198,711)
NOCTW: JP8.17 R52.1 U7.5 | length 633.7
  Top Layer w8: JP8.17 v1(-4,988) ; v1(88,700) U7.5
  Bottom Layer w8: v1(-4,988) -4,867.75 -49,822.75 -49,694.13 -37.87,683 71,683 ; R52.1 71,629.46 71,683 ; v1(88,700) 71,683
RXA_N: JP8.33 R4.1 T1.8 | length 2110.1
  Top Layer w9: JP8.33 396,973 407,984 460,984 480,964 480,862 461,843 461,688 524,625 524,215.51 628.75,110.76 628.75,47.71 R4.1 628.75,-16.79 628.75,-79.24 642.01,-92.5 801.01,-92.5 880.5,-171.99 880.5,-415.5 770,-526 T1.8
RXA_P: JP8.35 R3.1 T1.7 | length 1773.2
  Top Layer w9: JP8.35 446,868.26 446.5,867.76 446.5,681.99 509.5,618.99 509.5,209.5 614.25,104.75 614.25,47.71 R3.1 614.25,-16.79 614.25,-85.25 636,-107 795,-107 866,-178 866,-409.49 795.49,-480 751,-480 T1.7
RXB_N: JP8.34 R8.1 T2.8 | length 1107.1
  Top Layer w4: R8.1@545,828.46 R8.1@555.46,828.46
  Top Layer w9: JP8.34 396,1028 404,1020 517.5,1020 577,960.5 577,837 554.96,814.96 549.5,814.96 R8.1 577.25,778.21 577.25,249.24 644.49,182 T2.8
RXB_P: JP8.36 R7.1 T2.7 | length 1125
  Top Layer w4: R7.1@614.54,828.46 R7.1@623,828.46
  Top Layer w9: JP8.36 446,1052 460,1038 520.01,1038 591.5,966.51 591.5,837 613.54,814.96 619.5,814.96 R7.1 591.75,778.21 591.75,255.25 620,227 741,227 T2.7
S1_N: C47.1 R70.2 U7.32 U7.44 VT4.1 | length 1695
  Top Layer w8: R70.2 -469.24,-349.77 C47.1 -558,-245.46 -558,-68 -649,23 -649,302 -605.62,345.38 -366.62,345.38 -314,398 -314,398.18 -305.69,406.49 U7.32 ; v1(-70,480) -70,478 -69.47,477.47 U7.44
  Bottom Layer w8: v1(-343,368) -343,369.18 -302.88,409.3 -302.88,486.12 -289,500 -90,500 v1(-70,480)
  other v1: -398,-520 -346,-520 -348,-470 -398,-468 -347,-420 -398,-419
S2_N: C48.1 R71.2 U7.30 U7.39 VT5.1 | length 1137.1
  Top Layer w8: R71.2 -659.24,-2.23 C48.1 -726,64.54 -726,252 -614,364 -373.87,364 -345.06,392.81 U7.30 -345.06,476.94 -321,501 -191,501 -167.9,477.9 U7.39
  other v1: -713,-136 -741,-135 -741,-94 -712,-94 -743,-54 -713,-54
SH_A: C39.2 P3.1 R72.1 U7.46 VT1.1 VT4.5 | length 3523.3
  Top Layer w8: v1(-227,-365) -227,-364.46 C39.2 -337.31,-254.16 -337.31,149.31 -192.81,293.81 -156.42,293.81 -94.42,355.81 -65.19,355.81 -30.1,390.9 U7.46
  Top Layer w10: P3.1 -1224,-492 -1068,-648 -993,-648 -895,-746 -895,-908 -770.46,-1032.54 R72.1
  Bottom Layer w8: VT4.5@-275,-807.06 -227,-759.06 v1(-227,-365)
  Bottom Layer w50: P3.1 -1224,-491 -1061,-654 -998,-654 -917,-735 -353,-735 VT4.5@-349,-739
SH_B: C40.2 P4.1 R74.1 U7.41 VT2.1 VT5.5 | length 2669.7
  Top Layer w8: v1(-585,17) -585,41.46 C40.2 -444.54,109.46 -217,337 -186,337 -128.53,394.47 U7.41
  Top Layer w10: P4.1 -1144,-263.15 -1144,-525 -1054,-615 -982,-615 -867,-730 -867,-790 -775.46,-881.54 R74.1
  Bottom Layer w8: VT5.5@-1036,-191 -980,-247 -609,-247 -585,-223 v1(-585,17)
  Bottom Layer w50: P4.1 -1171.85,-131 VT5.5@-976,-131
SH_C: C41.2 P5.1 R76.1 U7.36 VT3.1 VT6.5 | length 2240.9
  Top Layer w8: v1(-568,271) -567.46,270.46 C41.2 -343.15,270.46 -226.95,386.66 U7.36
  Top Layer w10: P5.1 -1116,-82.33 -1116,-504 -1025,-595 -966,-595 -830.46,-730.54 R76.1
  Bottom Layer w8: VT6.5@-1045.06,323 -1004.06,282 -579,282 v1(-568,271)
  Bottom Layer w50: P5.1 -1139.67,110 VT3.1@-1045.06,110
SPIA_CLK: JP8.24 U7.11 | length 489.4
  Top Layer w8: U7.11 -30.1,702.1 v1(-30,702) ; v1(146,1015) JP8.24
  Bottom Layer w8: v1(-30,702) -30,818 146,994 v1(146,1015)
SPIA_CS: JP8.21 U7.8 | length 205.3
  Top Layer w8: U7.8 28.95,793.95 96,861 JP8.21
SPIA_SIMO: JP8.22 U7.9 | length 371.4
  Top Layer w8: U7.9 9.27,800.27 71,862 71,987 96,1012 JP8.22
SPIA_SOMI: JP8.26 U7.10 | length 421.5
  Top Layer w8: v1(-11,785) -10.42,784.42 U7.10 ; v1(166,989) 196,1019 JP8.26
  Bottom Layer w8: v1(-11,785) -11,812 v1(166,989)
TXA_N: JP8.29 R2.1 T1.2 | length 1352.5
  Top Layer w9: JP8.29 296,850 315.5,830.5 315.5,683.99 456.25,543.24 456.25,47.71 R2.1 456.25,-16.79 456.25,-93.99 552.76,-190.5 576.75,-190.5 612.25,-226 T1.2
TXA_P: JP8.31 R1.1 T1.1 | length 1412.3
  Top Layer w9: JP8.31 346,847 330,831 330,690 470.75,549.25 470.75,47.71 R1.1 470.75,-16.79 470.75,-87.99 558.76,-176 T1.1
TXB_N: JP8.30 R6.1 T2.2 | length 1253.3
  Top Layer w4: T2.2 T2.2@647,483
  Top Layer w9: JP8.30 296,1132 326,1162 475,1162 748.75,888.25 748.75,842.71 R6.1 776.5,805.96 771.71,805.96 748.75,783 748.75,657.25 826.25,579.75 826.25,528.81 780.44,483 T2.2@647,483
TXB_P: JP8.32 R5.1 T2.1 | length 1029.3
  Top Layer w9: JP8.32 346,1137 356.5,1147.5 468.99,1147.5 734.25,882.24 734.25,842.71 R5.1 706.5,805.96 711.29,805.96 734.25,783 734.25,651.24 811.75,573.75 811.75,548.75 795,532 T2.1
VA: C49.2 JP9.32 R72.2 R73.2 | length 501.8
  Top Layer w8: R72.2 R73.2 C49.2 -466.54,-1028 -313,-1028 -298,-1043 JP9.32
VB: C50.2 JP9.35 R74.2 R75.2 | length 299
  Top Layer w8: R74.2 R75.2 C50.2 -400.46,-948.46 JP9.35@-398,-946
VC: C51.2 JP9.33 R76.2 R77.2 | length 470.4
  Top Layer w8: R76.2 R77.2 C51.2 -404.54,-797.46 -348,-854 JP9.33
VDD33TXRX1: C1.2 C65.2 C67.2 L3.2 R1.2 R2.2 R3.2 R4.2 T1.3 T1.6 | length 2605.8
  Top Layer w15: v2(424,-96) R2.2@424,-65.46 ; R1.2 542.54,-51.46 v2(543,-51) 567.54,-51 R3.2@582,-65.46 ; R3.2 R3.2@582,-65.46 ; R4.2 C65.2 ; T1.3 813,-210 813,-154.32 792.18,-133.5 610.5,-133.5 582,-105 R3.2@582,-65.46 ; L3.2 756.54,84.46 795.46,45.54 795.46,5 C65.2 ; v2@915,-171 795.46,-51.46 C65.2
  Bottom Layer w10: T1.6 647,-397 747,-297 T1.3
  Bottom Layer w15: C67.2@424,-65.46 424,-113 587,-276 T1.3 ; C1.2@503,-65.46 517.46,-51 v2@529,-51 ; T1.6 580,-493 580,-548 614,-582 796,-582 915,-463 v2(915,-173)
VDD33TXRX2: C2.2 C66.2 C68.2 L2.2 R5.2 R6.2 R7.2 R8.2 T2.3 T2.6 | length 1201.6
  Top Layer w15: v1(508,761) 525.46,743.54 R8.2 ; R7.2 R5.2 662.46,704 660,704 660,699 v2(664,695) ; T2.3 803,432 866,495 866,590.33 782,674.33 v2(782,701) 781,702 R6.2
  Bottom Layer w10: T2.6 646,308 674.5,336.5 674.85,336.5 T2.3@746,407.65
  Bottom Layer w15: v1(508,761) 525.46,743.54 C66.2 C68.2 C2.2 ; v2(664,695) 664,705.54 C2.2 ; T2.3@746,407.65 T2.3 ; v2(782,701) 782,743.54 L2.2 780,743.54 C2.2
pads on no net: A.0 JP8.7 JP8.9 JP8.10 JP8.11 JP9.8 JP9.9 JP9.10 JP9.11 JP9.12 JP9.13 JP9.14 JP9.15 JP9.17 JP9.19 JP9.20 JP9.21 JP9.22 JP9.23 JP9.24 JP9.25 JP9.26 JP9.28 JP9.30 JP9.34 JP9.36 T1.0 T1.11 T1.12 T1.13 T1.14 T2.0 T2.11 T2.12 T2.13 T2.14 U6.7 U6.8 U7.1 U7.2 U7.3 U7.4 U7.50 U7.51 U7.52 U7.53 U7.54 U7.55 U7.56

## Polygon pours and split planes (outlines as drawn)
GND on Bottom Layer "Mechanical 1-No Net" (hatched 90Degree grid 10 track 8, remove dead copper, pour order 11): -999.53,948.52 -678,1200 -585,1250 -307.5,1344.5 -5,1381 230,1358 444,1306 593.22,1243.72 850,1083 1074,859 1074,858 1145,766 1273.06,527.32 1319,407 1372,114 1356.5,-242.5 1342,-305 1266,-546 1156.05,-750.74 1156.05,-753.95 974.69,-974.69 774,-1136 518,-1279 251.11,-1354.88 -36.07,-1377.48 -329,-1338 -391.36,-1321.21 -708,-1184 -858,-1084 -861,-1084 -1066,-879 -1247,-588 -1331,-349 -1377.48,-72.14 -1377.48,36.07 -1365,195 -1304,451 -1228.19,625.79
GND on Top Layer "Mechanical 1-No Net" (hatched 90Degree grid 10 track 8, remove dead copper, pour order 8): -482,1291 -286.59,1348.3 -108.11,1373.71 36.07,1377.48 179.86,1366.16 335,1337 479,1293 676,1202 780.48,1135.61 884.5,1059.5 1040,904 1146,766 1193.75,689.21 1267,538 1327,372 1342,311 1372,129 1372,-211 1359,-224 1327,-391.36 1243.72,-593.22 1193.75,-689.21 1057,-882 881.5,-1057.5 780.48,-1135.61 674,-1202 521,-1276 421,-1313.46 215.63,-1361.45 12,-1379 -179.86,-1366.16 -423.46,-1313.46 -618,-1232 -731,-1168 -922.35,-1024.37 -1029.86,-916.86 -1117,-804 -1200,-678 -1310.96,-425.96 -1366.16,-179.86 -1378.43,0 -1351,269 -1298.92,459.97 -1200,678 -1115.17,810.22 -1115.17,813.83 -974.69,974.69 -821,1108 -657.5,1210.97

## Other copper
Top Layer:
  rectangle net 48V: -1069.1,314 -922,524
  rectangle net 48V: -917,488 -853,854
  rectangle net 48V: -742,-495 -666,-343
  rectangle net 48V: -666,-556 -562,-343
  rectangle net 48V: -666,-607 -580,-556
  rectangle net 48V: -580,-607 -176,-554
  rectangle net 48V: -176,-744 100,-554
  rectangle net S2_N: -755,-160 -661,-35
  rectangle net 48V: -1296,312 -1069.1,455
  rectangle net 48V: -938,-552 -808,554
  rectangle net S1_N: -434,-548 -326,-389
  rectangle net 48V: -542,474 -485,580
  rectangle net 48V: -967,896 -872,942
  rectangle net GND: 224,853 269,1164
  rectangle net 48V: -411,405 -360,470
  rectangle net 3V3: -420,836 -284,976
  rectangle net 5V0: -505,1025 -286,1223
  rectangle net NetC20_2: -620,775 -541,823
  rectangle net 48V: -967,853 -768,901
  rectangle net GND: 330,-1167 471,-900
  rectangle net RXB_P: 460,1031 487,1088
  rectangle net 48V: -1111,445 -920,580
  rectangle net 48V: -856,832 -768,853
Bottom Layer:
  rectangle net 48V: -170,-743 98,-557
  rectangle net 48V: -840,-494 -562,-343
  rectangle net S2_N: -857,-168 -675,-39
  rectangle net 48V: -938,-552 -790,-295.5
  rectangle net 48V: -959,-17 -790,235
  rectangle net S1_N: -435.5,-618 -310,-390
  rectangle net SH_A: -125,-845 17,-775
  rectangle net SH_A: -200,-872 18,-844
  rectangle net SH_A: -449,-872 -199,-824
  rectangle net SH_B: -1087,-490 -1016,-347
  rectangle net SH_B: -1125,-490 -1087,-280
  rectangle net SH_B: -1125,-280 -1061,-31
  rectangle net SH_C: -1085,39 -1017,183
  rectangle net SH_C: -1124,40 -1085,254
  rectangle net SH_C: -1124,254 -1061,497
  rectangle net 48V: -424,405 -374,579
  rectangle net 48V: -537,475 -374,579
  rectangle net 48V: -967,903 -872,940
  rectangle net 5V0: -640,602 -593,753
  rectangle net 5V0: -593,600 -501,1089
  rectangle net 5V0: -502,1031 -387,1099
  rectangle net 5V0: -506,1062 -285,1224
  rectangle net 48V: -970,826 -826,903

## Silkscreen, mask and mechanical layers (free items; w line width, h text height)
Mechanical 1:
  circle w10: c0,0 r1377.95

## Text inside footprints (layer, text, board x,y; h text height)
U7: Top Overlay "*" at 178.75,760.5 h40 r270